# Altium PCB RASP_PICO_PCB.PcbDoc
Units mm, origin at the board's own origin, x right, y up, seen from the top; angles counter-clockwise.
Board outline 38.1 x 55.88 mm, 2 copper layers (Top Layer, Bottom Layer), stack 1.58 mm thick; 24 components, 49 nets, 184 pads, 14 vias.
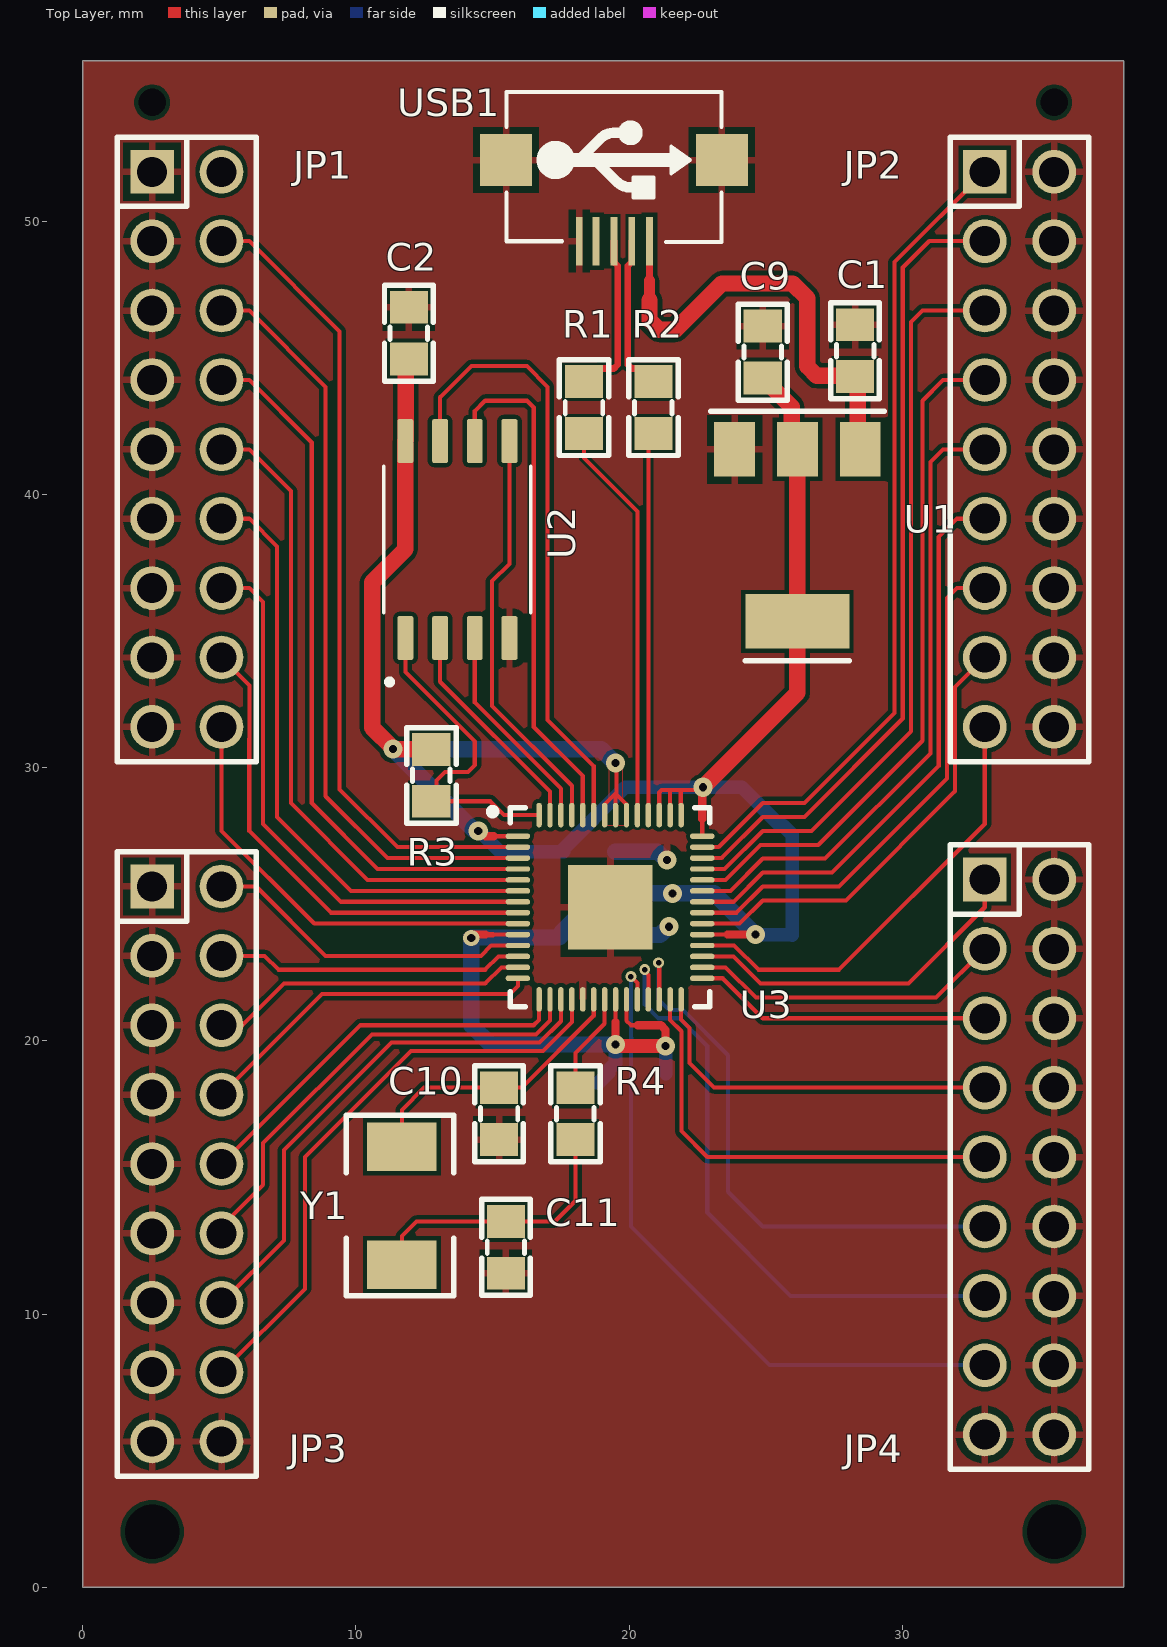
[diagram p0: Top Layer view]
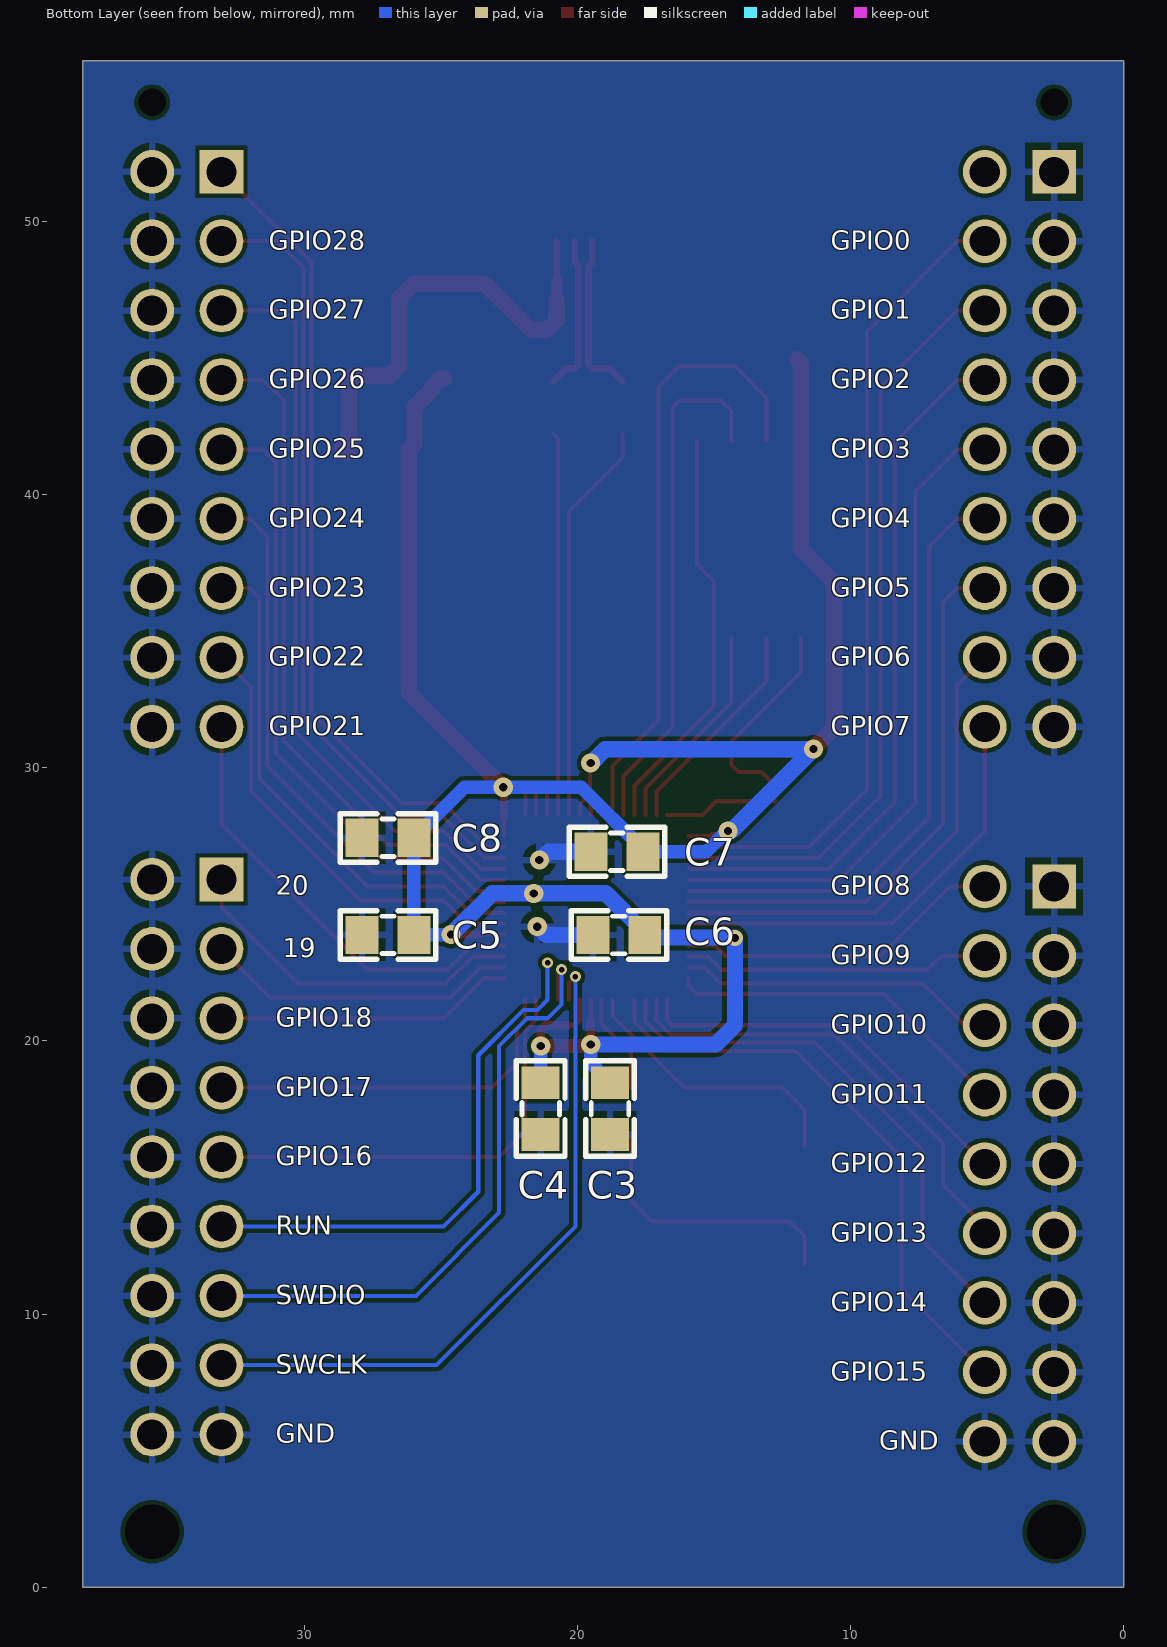
[diagram p1: Bottom Layer view, seen from below]
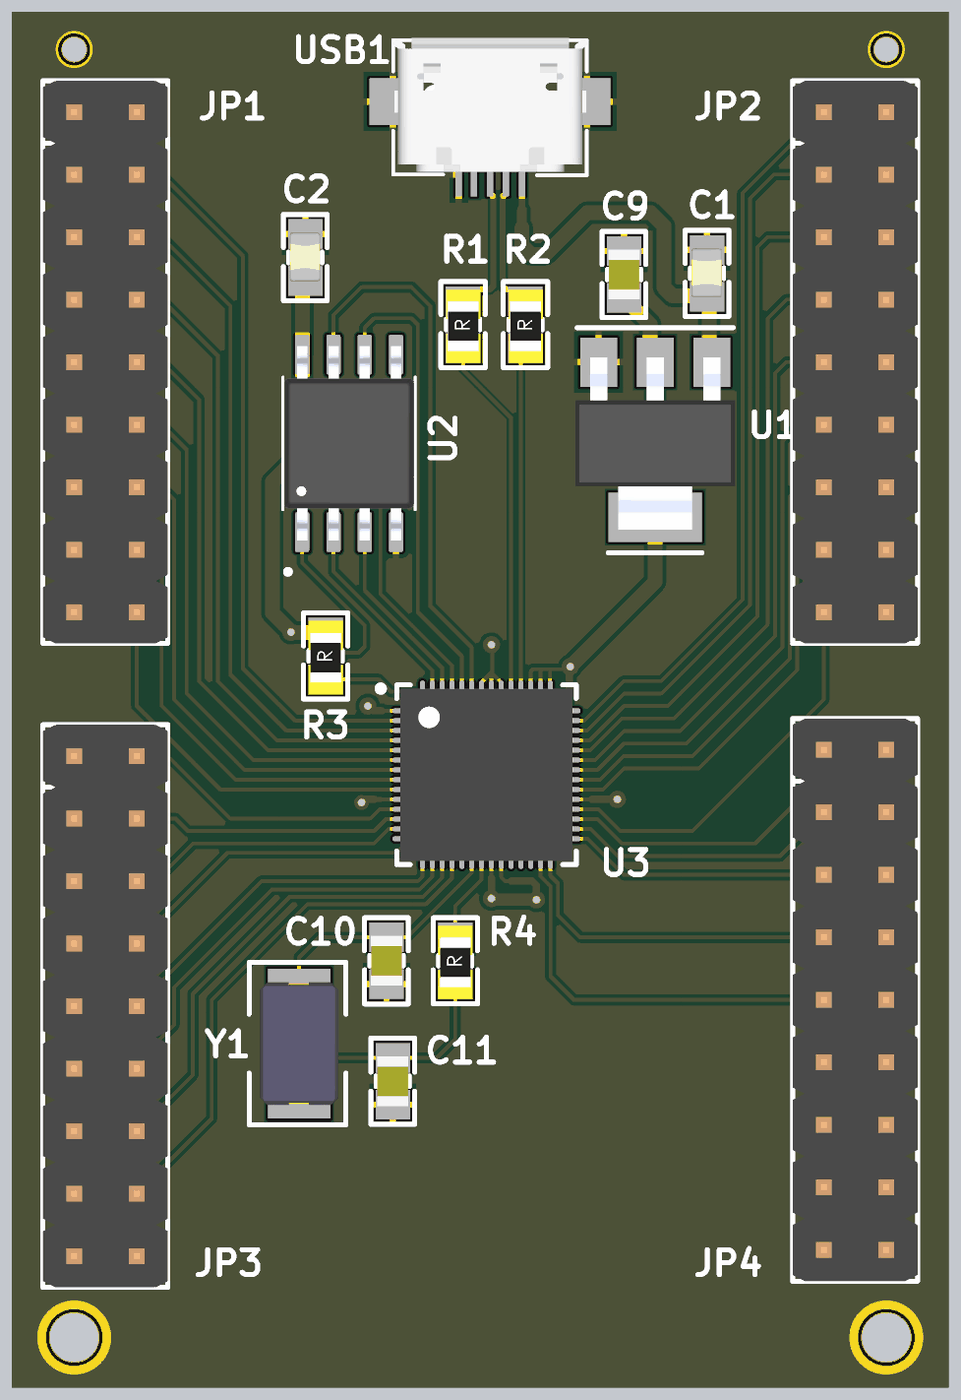
[diagram p2: 3D render of the assembled board from above, using the file's embedded part models]
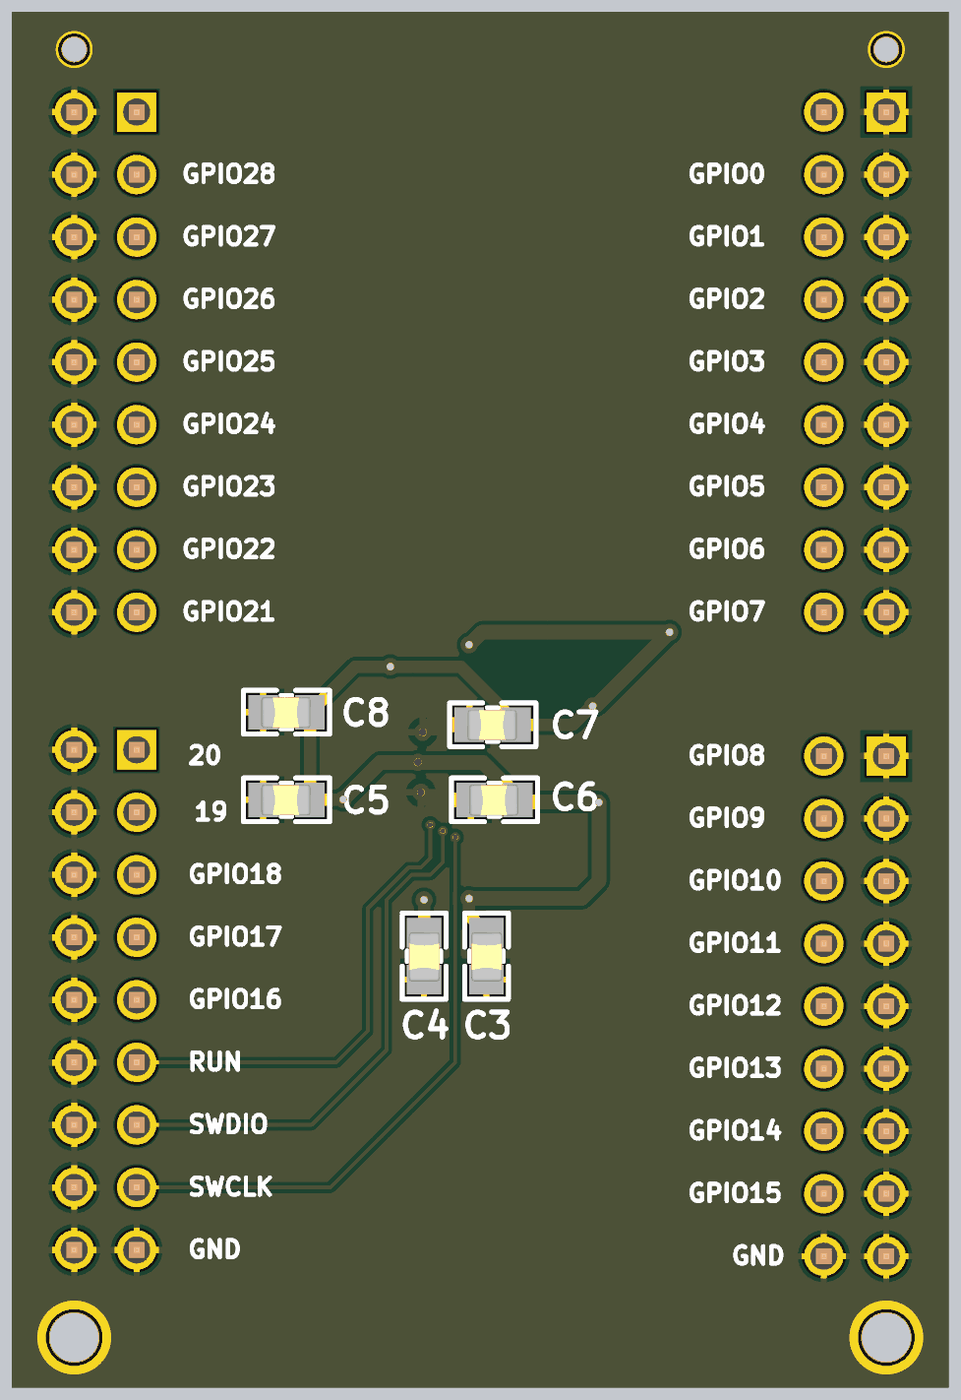
[diagram p3: 3D render of the assembled board from below, using the file's embedded part models]

## Layer stack, top to bottom
Top Solder: solder mask 0.01, Solder Resist, Dk 3.5
Top Layer: signal copper 0.035
Dielectric 1: dielectric 1.51, FR-4, Dk 4.8
Bottom Layer: signal copper 0.035
Bottom Solder: solder mask 0.01, Solder Resist, Dk 3.5

## Board outline
0,0 38.1,0 38.1,55.88 0,55.88

## Design rules (kind name [scope] priority, off if disabled: settings)
Clearance Clearance_dif90 [InNetClass('USB90')] p1: gap=0.1 ignorepadtopadclearanceinfootprint=TRUE
Clearance Clearance_1 [All] p2: gap=0.15 ignorepadtopadclearanceinfootprint=TRUE
DiffPairsRouting DiffPairsRouting_diff90 [All] p1: maxlimit=0.127 minlimit=0.127 mostfreqgap=0.127 toplayer_minwidth=0.242 toplayer_maxwidth=0.242 toplayer_prefwidth=0.242 bottomlayer_minwidth=0.242 bottomlayer_maxwidth=0.242 bottomlayer_prefwidth=0.242 impedanceprofiledriven=TRUE impedanceprofileid={8B085EE9-DDA1-47D5-B059-CF99E7A91BB4} impedanceprofilevalue=90.000000 maxuncoupledlength=12.7
PolygonConnect [All] p1: connectstyle=Relief reliefconductorwidth=0.254 reliefentries=4 polygonreliefangle="90 Angle" airgapwidth=0.254
RoutingVias [All] p1: holewidth=0.3 width=0.7 viastyle="Through Hole" minholewidth=0.2 minwidth=0.2 maxholewidth=1 maxwidth=1
SolderMaskExpansion [All] p1: expansion=0.102 istentingtop=FALSE
SupplyNets "Schematic Supply Nets_2" [InNet('GND')] p1: voltage=0.000
SupplyNets "Schematic Supply Nets_1" [InNet('3V3')] p2: voltage=0.000
SupplyNets "Schematic Supply Nets" [InNet('5V')] p3: voltage=0.000
Width [All] p1: maxlimit=1 minlimit=0.15 preferedwidth=0.254
29 further rules are at their usual default settings.

## Classes and differential pairs
net class USB90: NetR1_1 NetR2_1 USB_N USB_P
differential pair class diff90: USB
differential pair USB: +USB_P -USB_N

## Components (designator, comment, footprint, x,y, rotation, side; value= is the part's Value field where it differs from the comment)
C1 "10uF" "Cap 0805" 28.27,45.263 r90 top
C2 "10uF" "Cap 0805" 11.935,45.904 r90 top
C3 "100nF" "Cap 0805" 18.796,17.526 r270 bottom
C4 "100nF" "Cap 0805" 21.336,17.526 r270 bottom
C5 "100nF" "Cap 0805" 26.924,23.876 r0 bottom
C6 "100nF" "Cap 0805" 18.472,23.873 r0 bottom
C7 "100nF" "Cap 0805" 18.542,26.924 r0 bottom
C8 "100nF" "Cap 0805" 26.924,27.432 r0 bottom
C9 "100nF" "tu 0805" 24.892,45.212 r90 top
C10 "27pF" "tu 0805" 15.237,17.334 r90 top
C11 "27pF" "tu 0805" 15.494,12.446 r270 top
JP1 "JP 2x9 2.54" "JP 2x9 DT" 3.81,41.656 r270 top
JP2 "JP 2x9 2.54" "JP 2x9 DT" 34.29,41.656 r270 top
JP3 "JP 2x9 2.54" "JP 2x9 DT" 3.81,15.494 r270 top
JP4 "JP 2x9 2.54" "JP 2x9 DT" 34.29,15.748 r270 top
R1 "22R" "tro smd 0805" 18.288,43.18 r90 top
R2 "22R" "tro smd 0805" 20.828,43.18 r90 top
R3 "1k" "tro smd 0805" 12.7,29.718 r90 top
R4 "1k" "tro smd 0805" 17.973,17.334 r90 top
U1 "NCP1117LPS" SOT-223 26.162,41.656 r180 top
U2 "W25Q128JVSIM" SOIC127P790X216-8N 13.716,38.354 r90 top
U3 "RP2040TR7" QFN40P700X700X90_HS-57N 19.304,24.892 r0 top
USB1 "USB Micro 5p SMD" "USB Micro 5p SMD" 19.446,49.276 r0 top
Y1 "16Mhz" "Thach Anh 2 chan SMD5032" 11.684,13.97 r90 top value=4Mhz

## Footprints (in the part's own frame and the unit in brackets; to place one, negate y for a bottom-side part, rotate by r counter-clockwise, add the part's x,y. Pads: shape width x height; smd on the part's side, far side on the other; paste and mask are expansions set on the pad)
"Cap 0805" [mm] "Compoment SMD 80x50mil"
  rect 1.2x1.4 smd: 1(-0.946,-0.003) 2(0.954,-0.003)
  silkscreen extent -1.75,-0.89 1.75,0.89, body extent -0.97,-0.61 1.03,0.64, height 1.23
"JP 2x9 DT" [mm] "18 pins, dual pin, straight, gold plating"
  rect 1.6x1.6 hole 1.1: 1(-10.16,-1.27)
  round 1.6 hole 1.1: 2(-7.62,-1.27) 3(-5.08,-1.27) 4(-2.54,-1.27) 5(0,-1.27) 6(2.54,-1.27) 7(5.08,-1.27) 8(7.62,-1.27) 9(10.16,-1.27) 10(10.16,1.27) 11(7.62,1.27) 12(5.08,1.27) 13(2.54,1.27) 14(0,1.27) 15(-2.54,1.27) 16(-5.08,1.27) 17(-7.62,1.27) 18(-10.16,1.27)
  silkscreen extent -11.43,-2.54 11.43,2.54, body extent -11.43,-2.54 11.43,2.54, height 8.55
QFN40P700X700X90_HS-57N [mm] "QFN, 56-Leads, Body 7.00x7.00mm, Pitch 0.40mm, Thermal Pad 0.31x0.31mm, IPC Medium Density"
  oval 0.9x0.2 smd: 1(-3.375,2.6) 2(-3.375,2.2) 3(-3.375,1.8) 4(-3.375,1.4) 5(-3.375,1) 6(-3.375,0.6) 7(-3.375,0.2) 8(-3.375,-0.2) 9(-3.375,-0.6) 10(-3.375,-1) 11(-3.375,-1.4) 12(-3.375,-1.8) 13(-3.375,-2.2) 14(-3.375,-2.6) 29(3.375,-2.6) 30(3.375,-2.2) 31(3.375,-1.8) 32(3.375,-1.4) 33(3.375,-1) 34(3.375,-0.6) 35(3.375,-0.2) 36(3.375,0.2) 37(3.375,0.6) 38(3.375,1) 39(3.375,1.4) 40(3.375,1.8) 41(3.375,2.2) 42(3.375,2.6)
  oval 0.2x0.9 smd: 15(-2.6,-3.375) 16(-2.2,-3.375) 17(-1.8,-3.375) 18(-1.4,-3.375) 19(-1,-3.375) 20(-0.6,-3.375) 21(-0.2,-3.375) 22(0.2,-3.375) 23(0.6,-3.375) 24(1,-3.375) 25(1.4,-3.375) 26(1.8,-3.375) 27(2.2,-3.375) 28(2.6,-3.375) 43(2.6,3.375) 44(2.2,3.375) 45(1.8,3.375) 46(1.4,3.375) 47(1,3.375) 48(0.6,3.375) 49(0.2,3.375) 50(-0.2,3.375) 51(-0.6,3.375) 52(-1,3.375) 53(-1.4,3.375) 54(-1.8,3.375) 55(-2.2,3.375) 56(-2.6,3.375)
  rect 3.1x3.1 smd: 57(0,0)
  silkscreen extent -4.42,-3.65 3.65,3.65, body extent -3.51,-3.51 3.51,3.51, height 0.9
SOIC127P790X216-8N [mm]
  rrect25% 1.61x0.58 smd: 1(-3.605,1.905) 2(-3.605,0.635) 3(-3.605,-0.635) 4(-3.605,-1.905) 5(3.605,-1.905) 6(3.605,-0.635) 7(3.605,0.635) 8(3.605,1.905)
  silkscreen extent -5.31,-2.69 2.69,2.69, body extent -3.95,-2.64 3.95,2.64, height 2.16
SOT-223 [mm]
  rect 1.5x2 smd: 1(-2.3,0) 2(0,0) 3(2.3,0)
  rect 3.8x2 smd: 2(0,6.3)
  silkscreen extent -3.17,-1.4 3.17,7.75, body extent -3.25,-0.2 3.25,6.8, height 1.8
"Thach Anh 2 chan SMD5032" [mil] "DO-214-AA/SMB; 2 C-Bend Leads; Body 5.3 x 3.6 mm, inc. leads (LxW)"
  rect 70x100 smd: 1(-85,0) 2(85,0)
  silkscreen extent -130,-75 130,80, body extent -98,-63 98,63, height 51
"tro smd 0805" [mm]
  rect 1.2x1.4 smd: 1(-0.946,-0.061) 2(0.954,-0.061)
  silkscreen extent -1.75,-0.97 1.75,0.84, body extent -1.56,-0.76 1.44,0.64, height 0.53
"tu 0805" [mm] "Compoment SMD 80x50mil"
  rect 1.2x1.4 smd: 1(-0.946,-0.003) 2(0.954,-0.003)
  silkscreen extent -1.75,-0.89 1.75,0.89, body extent -1.01,-0.64 1.01,0.63, height 0.61
"USB Micro 5p SMD" [mil]
  rect 10x70 smd: 1(51.18,0) 2(25.59,0) 3(0,0) 4(-25.59,0) 5(-50,0)
  rect 74.8x74.8 smd: 5(-155.51,116.84) 5(155.51,116.84)
  silkscreen extent -155,-1 155,215, body extent -157,5 158,218, height 107

## Part data
C1 C2 C3 C4 C5 C6 C7 C8: library part "Cap 0805", "Capacitor SMD 0805"
C9 C10 C11: library part "Tu 0805 101 50V 20%", "Dán", Chung_Loai=Dán, Don_Vi=Con, Ma_Hang=MH002806, So_Chan=2, Ten_Linh_Kien="Tụ 0805 101-0.1nF 50V 20%"
JP1 JP2 JP3 JP4: library part "JP 2x9 2.54 Duc Thang", "Cắm", Chung_Loai=Cắm, Don_Vi=Con, Ma_Hang=MH002686, Ten_Linh_Kien="Jump Đôi Đực 2.54MM 2x40P Thẳng 11MM"
R1 R2: library part "Tro 0805 5% 22R", "Dán", Chung_Loai=Dán, Don_Vi=Con, Ma_Hang=MH005249, So_Chan=2, Ten_Linh_Kien="Trở 0805 5% 22R"
R3 R4: library part "Tro 0805 1% 1k", "Dán", Chung_Loai=Dán, Don_Vi=Con, Ma_Hang=MH005468, So_Chan=2, Ten_Linh_Kien="Trở 0805 1% 1k"
U1: "IC 3V3"
U2: "NOR Flash Serial (SPI, Dual SPI, Quad SPI) 3V/3.3V 128M-bit 16M x 8 6ns 8-Pin SOIC Tube", Ambient Temperature Range High=85°C, Clock Frequency=133MHz, Manufacturer=Winbond, Max Supply Current=20mA, Max Supply Voltage=3.6V, Min Operating Temperature=-40°C, Min Supply Voltage=2.7V, Operating Supply Voltage=3V, Supplier Part Number=W25Q128JVSIM-ND, Category=Flash, China RoHS=Compliant, ComponentLink1Description=https://datasheet.octopart.com:443/W25Q128JVSIM-Winbond-datasheet-181529389.pdf?src-supplier=ODG+(Origin+Data+Global), ComponentLink1URL=https://datasheet.octopart.com:443/W25Q128JVSIM-Winbond-datasheet-181529389.pdf?src-supplier=ODG+(Origin+Data+Global), ComponentLink2Description=https://datasheet.octopart.com:443/W25Q128JVSIM-Winbond-datasheet-138898756.pdf?src-supplier=Augswan, ComponentLink2URL=https://datasheet.octopart.com:443/W25Q128JVSIM-Winbond-datasheet-138898756.pdf?src-supplier=Augswan, ComponentLink3Description=https://sigma.octopart.com:443/138898685/technical_drawing/Winbond-W25Q128JVSIM.pdf?src-supplier=Upverter, ComponentLink3URL=https://sigma.octopart.com:443/138898685/technical_drawing/Winbond-W25Q128JVSIM.pdf?src-supplier=Upverter, Frequency=133MHz, Height=2.16mm, Height - Seated (Max)=2.16mm, Interface=Serial, Length=5.23mm, Lifecycle Status=Production, Manufacturer Part Number=W25Q128JVSIM, Max Operating Temperature=85°C, Memory Format=FLASH, Memory Size=16MB, Number of Circuits=1, Number of Terminals=8, Pricing="1=1.97, 10=1.846, 25=1.7932, 90=1.71878, 180=1.6785, 270=1.65493, 540=1.61485, 1080=1.57507, 5040=1.48849 (USD)", REACH SVHC=Yes, RoHS=Compliant, Schedule B="8542320070, 8542320070|8542320070, 8542320070|8542320070|8542320070, 8542320070|8542320070|8542320070|8542320070", Stock=18270, Supplier=DigiKey, Terminal Pitch=1.27mm, Width=5.23mm
USB1: "USB Type B", Ma_Hang=MH001020, Ten="MicroUSB MK5P SMD"
Y1: library part "Thach Anh 2 chan SMD 5032", "Crystal For all Crystal 2pin."

## Free pads (board coordinates)
  round 0 hole 2 mask+1.5: hole3(2.54,2.032) hole3(35.56,2.032)
  round 0 hole 1 mask+0.75: hole3(2.54,54.356) hole3(35.56,54.356)

## Via types
v1: diameter 0.7, hole 0.3, Top Layer to Bottom Layer, tented both sides, 10 vias
v2: diameter 0.4, hole 0.2, Top Layer to Bottom Layer, tented both sides, 3 vias
v3: diameter 0.6, hole 0.3, Top Layer to Bottom Layer, tented both sides, 1 vias

## Nets (pads, with @x,y where several pads share a name; then routed paths per layer and width w, separated by ;. In a path a pad name is that pad's centre, name@x,y a point inside that pad or via, vN(x,y) a via of type N, cw(c..) or ccw(c..) an arc to the next point about the centre after c; other vN are vias at no path point)
3V3: C2.1 C3.1 C4.1 C5.1 C6.1 C7.1 C8.1 C9.1 R3.2 U1.2 U2.8 U3.1 U3.10 U3.22 U3.23 U3.33 U3.42 U3.43 U3.44 U3.45 U3.48 U3.49 U3.50 | length 109.6
  Top Layer w0.15: 15.002,23.892 U3.10 ; 15.046,27.492 U3.1 ; U3.50 19.114,28.277 19.114,28.664 19.504,29.054 U3.49 ; 19.504,20.686 U3.22 ; v1(19.507,30.175) 19.536,30.147 19.536,29.023 19.894,28.664 19.894,28.277 U3.48 ; U3.23 19.904,20.736 20.066,20.574 20.32,20.574 ; U3.45@21.114,28.277 U3.45 21.104,29.093 21.192,29.181 21.504,29.181 ; U3.44 21.504,29.181 ; U3.43 21.894,28.277 21.894,28.662 21.891,28.666 21.891,29.181 ; v1@22.591,29.181 21.891,29.181 ; U3.33 23.606,23.892 ; U3.42 22.679,28.121 ; 21.504,29.181 21.63,29.181 21.891,29.181
  Top Layer w0.2: 14.748,23.892 15.002,23.892
  Top Layer w0.3: v3(14.224,23.767) 14.224,23.876 14.24,23.892 14.748,23.892 ; v1(14.478,27.686) 14.548,27.686 14.742,27.492 15.046,27.492 ; v1(19.504,19.866) 19.504,20.686 ; 20.32,20.574 21.16,20.574 21.336,20.398 v1(21.336,19.812) ; 22.679,28.121 v1@22.679,29.143 ; 23.606,23.892 v1(24.622,23.892)
  Top Layer w0.5: v1(19.504,19.866) 19.542,19.828 19.684,19.828 19.699,19.812 v1(21.336,19.812)
  Top Layer w0.6: C2.1 11.821,44.841 11.821,41.969 U2.8 11.811,38.002 10.592,36.783 10.592,31.472 11.354,30.71 v1(11.354,30.683) 11.359,30.678 12.755,30.678 R3.2 ; v1(22.708,29.286) 26.162,32.741 26.162,35.356 26.162,41.656 25.957,41.861 25.957,43.205 25.295,43.866 25.295,43.966 24.995,44.266 C9.1 C9.1@24.86,44.231
  Bottom Layer w0.5: v1(14.478,27.686) 14.516,27.686 15.275,26.927 C7.1 17.596,27.027 19.855,29.286 v1(22.708,29.286) 24.128,29.286 25.528,27.885 25.628,27.885 25.978,27.535 C8.1 C5.1 25.972,23.886 24.628,23.886 v1(24.622,23.892) ; C3.1 18.899,18.472 19.249,18.822 19.249,18.931 19.504,19.186 v1(19.504,19.866) ; C4.1@21.336,18.796 21.338,18.798 21.338,19.81 v1(21.336,19.812)
  Bottom Layer w0.6: v1(14.478,27.686) 14.459,27.705 14.332,27.705 v1(11.354,30.683) 18.972,30.683 19.48,30.175 v1(19.507,30.175) ; v1(19.504,19.866) 14.932,19.866 14.224,20.574 v3(14.224,23.767) 14.243,23.786 17.436,23.786 C6.1 17.526,23.976 18.95,25.4 v1(21.59,25.4) 23.114,25.4 v1(24.622,23.892)
5V: C1.1 U1.1 USB1.1 | length 16.6
  Top Layer w0.25: 20.746,47.834 USB1.1
  Top Layer w0.4: 20.746,47.111 20.746,47.834
  Top Layer w0.6: 20.746,47.111 20.746,46.382 21.097,46.031 21.697,46.031 23.393,47.727 25.984,47.727 26.518,47.193 26.518,44.694 26.869,44.343 C1.1@27.969,44.343 ; C1.1 28.368,44.223 28.368,41.75 U1.1
  Top Layer w0.8: U1.1 U1.1@28.49,41.684
CLK: U2.6 U3.52 | length 19.2
  Top Layer w0.15: U2.6 14.351,43.053 14.732,43.434 16.256,43.434 16.51,43.18 16.51,31.496 18.304,29.702 U3.52
CS: R3.1 U2.1 U3.56 | length 12.3
  Top Layer w0.15: U2.1 11.811,33.501 14.351,30.961 14.351,30.099 14.099,29.847 13.261,29.847 12.949,29.535 12.949,28.96 R3.1 14.916,28.772 15.421,28.267 U3.56
GND: C1.2 C2.2 C3.2 C4.2 C5.2 C6.2 C7.2 C8.2 C9.2 C10.1 C11.2 JP1.1 JP1.2 JP1.3 JP1.4 JP1.5 JP1.6 JP1.7 JP1.8 JP1.9 JP2.10 JP2.11 JP2.12 JP2.13 JP2.14 JP2.15 JP2.16 JP2.17 JP2.18 JP3.1 JP3.2 JP3.3 JP3.4 JP3.5 JP3.6 JP3.7 JP3.8 JP3.9 JP3.10 JP4.9 JP4.10 JP4.11 JP4.12 JP4.13 JP4.14 JP4.15 JP4.16 JP4.17 JP4.18 U1.3 U2.4 U3.19 U3.57 USB1.5 | length 4.2
  Bottom Layer w0.6: C6.2 21.131,23.876 21.436,24.181 v1(21.463,24.181) ; C7.2 21.052,26.927 21.36,26.619 v1(21.387,26.619)
GPIO0: JP1.17 U3.2 | length 29.9
  Top Layer w0.15: JP1.17 6.096,49.276 9.398,45.974 9.398,29.21 11.516,27.092 U3.2
GPIO1: JP1.16 U3.3 | length 27.9
  Top Layer w0.15: JP1.16 6.096,46.736 8.89,43.942 8.89,28.956 11.154,26.692 U3.3
GPIO2: JP1.15 U3.4 | length 26
  Top Layer w0.15: JP1.15 6.096,44.196 8.382,41.91 8.382,28.702 10.792,26.292 U3.4
GPIO3: JP1.14 U3.5 | length 24.1
  Top Layer w0.15: JP1.14 6.096,41.656 7.62,40.132 7.62,28.702 10.43,25.892 U3.5
GPIO4: JP1.13 U3.6 | length 22.3
  Top Layer w0.15: JP1.13 6.096,39.116 7.112,38.1 7.112,28.194 9.814,25.492 U3.6
GPIO5: JP1.12 U3.7 | length 20.4
  Top Layer w0.15: JP1.12 6.096,36.576 6.604,36.068 6.604,27.94 9.452,25.092 U3.7
GPIO6: JP1.11 U3.8 | length 17.9
  Top Layer w0.15: JP1.11 6.105,33.011 6.105,31.071 6.096,31.062 6.096,27.686 9.09,24.692 U3.8
GPIO7: JP1.10 U3.9 | length 16.1
  Top Layer w0.15: JP1.10 5.08,27.686 8.474,24.292 U3.9
GPIO8: JP3.18 U3.11 | length 12.1
  Top Layer w0.15: JP3.18 6.35,25.654 8.89,23.114 14.574,23.114 14.952,23.492 U3.11
GPIO9: JP3.17 U3.12 | length 11.3
  Top Layer w0.15: JP3.17 6.659,23.114 7.167,22.606 14.732,22.606 15.218,23.092 U3.12
GPIO10: JP3.16 U3.13 | length 11.7
  Top Layer w0.15: JP3.16 5.842,20.574 7.366,22.098 14.732,22.098 15.326,22.692 U3.13
GPIO11: JP3.15 U3.14 | length 12.8
  Top Layer w0.15: JP3.15 8.763,21.717 15.641,21.717 15.929,22.005 U3.14
GPIO12: JP3.14 U3.15 | length 14.6
  Top Layer w0.15: JP3.14 10.16,20.574 16.51,20.574 16.704,20.768 U3.15
GPIO13: JP3.13 U3.16 | length 17.1
  Top Layer w0.15: JP3.13 5.08,13.208 6.604,14.732 6.604,16.256 10.583,20.235 16.595,20.235 17.104,20.744 U3.16
GPIO14: JP3.12 U3.17 | length 19.4
  Top Layer w0.15: JP3.12 7.366,12.7 7.366,16.002 11.299,19.935 16.719,19.935 17.504,20.719 U3.17
GPIO15: JP3.11 U3.18 | length 21.8
  Top Layer w0.15: JP3.11 8.128,10.922 8.128,15.748 12.015,19.635 16.844,19.635 17.904,20.695 U3.18
GPIO16: JP4.5 U3.27 | length 16.5
  Top Layer w0.15: U3.27 21.504,20.761 21.911,20.354 21.911,16.697 22.86,15.748 JP4.5
GPIO17: JP4.4 U3.28 | length 13.6
  Top Layer w0.15: U3.28 21.904,20.785 22.211,20.478 22.211,19.191 23.114,18.288 JP4.4
GPIO18: JP4.3 U3.29 | length 10.9
  Top Layer w0.15: U3.29 23.428,22.292 24.892,20.828 JP4.3
GPIO19: JP4.2 U3.30 | length 11.5
  Top Layer w0.15: U3.30 23.536,22.692 24.638,21.59 31.242,21.59 JP4.2
GPIO20: JP4.1 U3.31 | length 12.9
  Top Layer w0.15: U3.31 23.821,23.092 24.815,22.098 30.226,22.098 33.02,24.892 JP4.1
GPIO21: JP2.9 U3.32 | length 16.5
  Top Layer w0.15: U3.32 23.846,23.492 24.732,22.606 27.686,22.606 33.02,27.94 JP2.9
GPIO22: JP2.8 U3.34 | length 16.6
  Top Layer w0.15: U3.34 24.038,24.292 24.892,25.146 27.94,25.146 31.934,29.14 31.934,32.95 JP2.8
GPIO23: JP2.7 U3.35 | length 19.1
  Top Layer w0.15: U3.35 23.93,24.692 24.892,25.654 27.686,25.654 31.634,29.602 31.634,36.206 32.004,36.576 JP2.7
GPIO24: JP2.6 U3.36 | length 21.1
  Top Layer w0.15: U3.36 23.822,25.092 24.892,26.162 27.432,26.162 31.334,30.064 31.334,38.446 32.004,39.116 JP2.6
GPIO25: JP2.5 U3.37 | length 23.3
  Top Layer w0.15: U3.37 23.714,25.492 24.892,26.67 27.178,26.67 31.034,30.526 31.034,41.194 31.496,41.656 JP2.5
GPIO26: JP2.4 U3.38 | length 25.2
  Top Layer w0.15: U3.38 23.522,25.892 24.808,27.178 26.924,27.178 30.734,30.988 30.734,43.434 31.496,44.196 JP2.4
GPIO27: JP2.3 U3.39 | length 27.6
  Top Layer w0.15: U3.39 23.498,26.292 24.892,27.686 26.67,27.686 30.318,31.334 30.318,46.32 30.734,46.736 JP2.3
GPIO28: JP2.2 U3.40 | length 29.4
  Top Layer w0.15: U3.40 23.39,26.692 24.892,28.194 26.416,28.194 30.018,31.796 30.018,48.306 30.988,49.276 JP2.2
GPIO29: JP2.1 U3.41 | length 30.3
  Top Layer w0.15: U3.41 23.282,27.092 24.892,28.702 26.416,28.702 29.718,32.004 29.718,48.514 JP2.1
IO0: U2.5 U3.53 | length 15.2
  Top Layer w0.15: U2.5 15.621,37.465 14.986,36.83 14.986,32.258 17.904,29.34 U3.53
IO1: U2.2 U3.55 | length 8.1
  Top Layer w0.15: U2.2 13.081,33.147 17.104,29.124 U3.55
IO2: U2.3 U3.54 | length 7.8
  Top Layer w0.15: U2.3 14.351,32.385 17.504,29.232 U3.54
IO3: U2.7 U3.51 | length 22.7
  Top Layer w0.15: U2.7 13.081,43.561 14.224,44.704 16.256,44.704 17.018,43.942 17.018,31.75 18.704,30.064 U3.51
NetC11_1: C11.1 R4.1 Y1.1 | length 10.2
  Top Layer w0.15: Y1.1 11.684,12.852 12.223,13.392 C11.1 17.278,13.392 18.034,14.148 R4.1
NetR1_1: R1.1 U3.47 | length 14.8
  Top Layer w0.15: R1.1 18.349,41.341 20.304,39.386 U3.47
NetR2_1: R2.1 U3.46 | length 14
  Top Layer w0.15: U3.46 20.704,42.05 R2.1
RUN: JP4.6 U3.26 | length 21
  Top Layer w0.15: v2(21.082,22.86) 21.104,22.838 U3.26
  Bottom Layer w0.15: v2(21.082,22.86) 21.082,21.506 21.46,21.128 21.968,21.128 23.622,19.474 23.622,14.478 24.892,13.208 JP4.6
SWCLK: JP4.8 U3.24 | length 25.1
  Top Layer w0.15: v2(20.066,22.352) 20.304,22.114 U3.24
  Bottom Layer w0.15: v2(20.066,22.352) 20.066,20.117 20.079,20.104 20.079,19.628 20.066,19.615 20.066,13.208 25.146,8.128 JP4.8
SWDIO: JP4.7 U3.25 | length 22.8
  Top Layer w0.15: v2(20.574,22.606) 20.574,22.538 20.704,22.408 U3.25
  Bottom Layer w0.15: v2(20.574,22.606) 20.574,21.336 21.082,20.828 21.844,20.828 22.86,19.812 22.86,13.716 25.908,10.668 JP4.7
USB_N: R2.2 USB1.2 | length 5.8
  Top Layer w0.242: USB1.2 20.096,48.514 19.955,48.374 19.955,44.755 20.097,44.613 20.41,44.613 R2.2
USB_P: R1.2 USB1.3 | length 6.1
  Top Layer w0.242: R1.2 18.828,44.613 19.445,44.613 19.586,44.755 19.586,48.373 19.446,48.514 USB1.3
XIN: C10.2 U3.20 Y1.2 | length 10.4
  Top Layer w0.15: Y1.2 11.684,17.475 12.497,18.288 C10.2 15.246,18.294 16.077,18.294 18.704,20.921 U3.20
XOUT: R4.2 U3.21 | length 3.7
  Top Layer w0.15: R4.2 18.034,19.558 19.104,20.628 U3.21
pads on no net: JP1.18 USB1.4

## Polygon pours and split planes (outlines as drawn)
GND on Top Layer "GND_L01_P001" (solid, remove dead copper, pour order 1): 0,55.88 38.1,55.88 38.1,0 0,0
3V3 on Top Layer "3V3" (solid, remove dead copper, pour order 0): 19.507,30.175 19.253,29.921 19.253,28.804 19.101,28.651 19.101,27.889 19.914,27.889 19.894,27.908 19.894,28.664 19.715,28.843 19.761,28.889 19.761,29.921 19.533,30.15
GND on Bottom Layer "GND_L02_P002" (solid, remove dead copper, pour order 2): 0,55.88 38.1,55.88 38.1,0 0,0

## Silkscreen, mask and mechanical layers (free items; w line width, h text height)
Bottom Overlay:
  text "GPIO0" at 10.722,48.968 h0.7
  text "GPIO28" at 31.296,48.968 h0.7
  text "GPIO1" at 10.722,46.428 h0.7
  text "GPIO27" at 31.296,46.428 h0.7
  text "GPIO2" at 10.722,43.888 h0.7
  text "GPIO26" at 31.296,43.888 h0.7
  text "GPIO3" at 10.722,41.348 h0.7
  text "GPIO25" at 31.296,41.348 h0.7
  text "GPIO4" at 10.722,38.808 h0.7
  text "GPIO24" at 31.296,38.808 h0.7
  text "GPIO5" at 10.722,36.268 h0.7
  text "GPIO23" at 31.296,36.268 h0.7
  text "GPIO6" at 10.722,33.728 h0.7
  text "GPIO22" at 31.296,33.728 h0.7
  text "GPIO7" at 10.722,31.188 h0.7
  text "GPIO21" at 31.296,31.188 h0.7
  text "GPIO8" at 10.722,25.346 h0.7
  text "20" at 31.042,25.346 h0.7
  text "19" at 30.788,23.06 h0.7
  text "GPIO9" at 10.722,22.806 h0.7
  text "GPIO18" at 31.042,20.52 h0.7
  text "GPIO10" at 10.722,20.266 h0.7
  text "GPIO17" at 31.042,17.98 h0.7
  text "GPIO11" at 10.722,17.726 h0.7
  text "GPIO16" at 31.042,15.44 h0.7
  text "GPIO12" at 10.722,15.186 h0.7
  text "RUN" at 31.042,12.9 h0.7
  text "GPIO13" at 10.722,12.646 h0.7
  text "SWDIO" at 31.042,10.36 h0.7
  text "GPIO14" at 10.722,10.106 h0.7
  text "SWCLK" at 31.042,7.82 h0.7
  text "GPIO15" at 10.722,7.566 h0.7
  text "GND" at 31.042,5.28 h0.7
  text "GND" at 8.944,5.026 h0.7